# Altium PCB 0.PCB1.PcbDoc (part 7 of 8)
Units mil, origin at the board's own origin, x right, y up, seen from the top; angles counter-clockwise.
Board outline 3897.64 x 3897.64 mil, 6 copper layers (Top Layer, Layer 1, Layer 3, Layer 4, Layer 2, Bottom Layer), stack 60.567 mil thick; 715 components, 563 nets, 2530 pads, 1442 vias.
Unrouted connection lines stored in the file: 6.
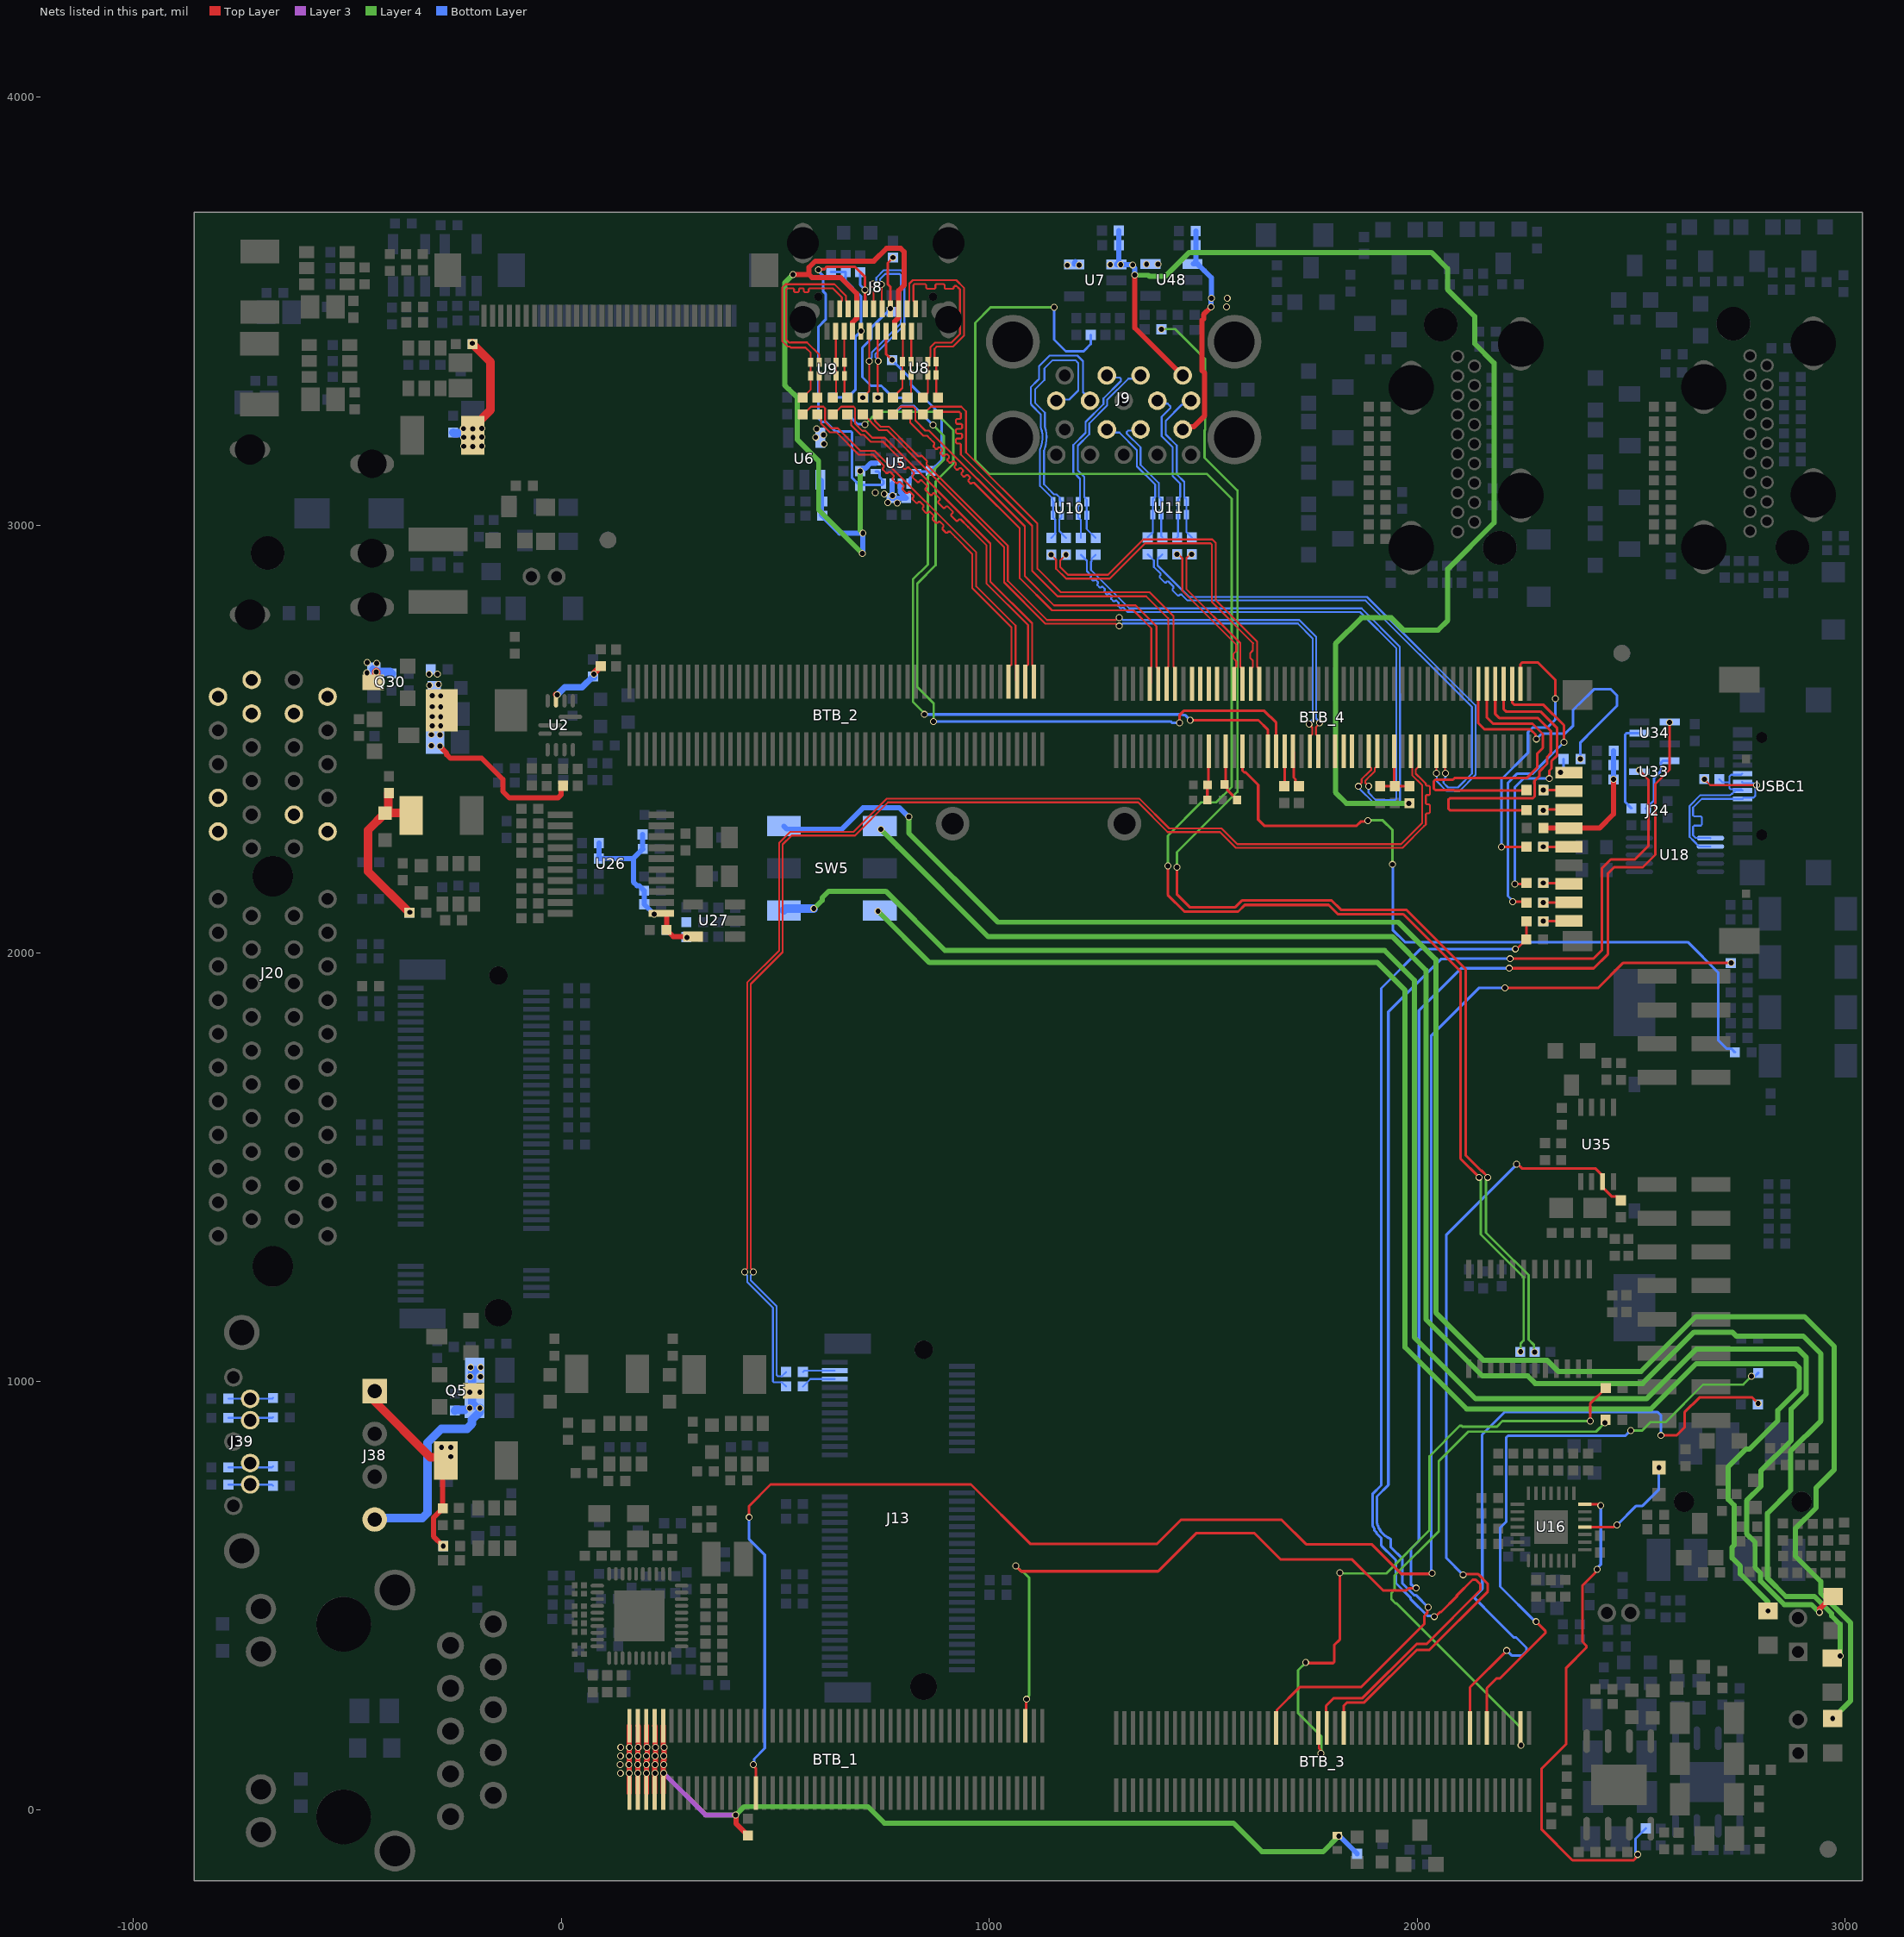
[diagram p11: the nets of this part, all layers, seen from the top]

## Via types
v1: diameter 16.14, hole 11.81, Top Layer to Bottom Layer, tented both sides, 1434 vias
v2: diameter 16.14, hole 11.81, Top Layer to Bottom Layer, 8 vias

## Nets (pads, with @x,y where several pads share a name; then routed paths per layer and width w, separated by ;. In a path a pad name is that pad's centre, name@x,y a point inside that pad or via, vN(x,y) a via of type N, cw(c..) or ccw(c..) an arc to the next point about the centre after c; other vN are vias at no path point) (continued)
RESETn: BTB_1.85 R5.2 | length 4461.4
  Top Layer w6.16: v1(439.3,682.4) 439.3,709.1 489.4,759.2 957.5,759.2 1096.6,620.1 1391.4,620.1 1447.8,676.5 1683.5,676.5 1740.4,619.6 1893.5,619.6 1962.7,550.4 2032.8,550.4 v1(2034.5,552.1) ; v1(448.9,105.1) 448.9,102.4 454.76,96.54 454.76,55.76 BTB_1.85@454.2,55.2 ; v1(2205,1918.9) 2422.6,1918.9 2481.6,1977.9 v1(2733.4,1977.9)
  Bottom Layer w6.16: v1(439.3,682.4) 439.3,631.1 475.7,594.7 475.7,143 450.81,118.11 450.81,107.01 v1(448.9,105.1) ; v1(2034.5,552.1) 2032.84,553.76 2032.84,594.84 2033.2,595.2 2033.2,1808.2 2143.9,1918.9 v1(2205,1918.9) ; R5.2@2732.42,1977 2732.5,1977 v1(2733.4,1977.9)
ROUT1: C287.1 U16.11 | length 260.4
  Top Layer w6.16: U16.11@2391.71,659.92 2459.5,659.92 2463.96,664.37 v1(2466.61,664.37)
  Bottom Layer w6.16: v1(2466.61,664.37) 2466.66,664.37 2511.63,709.35 2526.53,709.35 2564.81,747.62 v1(2564.81,798.62)
ROUT2: C308.1 U16.14 | length 1194.7
  Top Layer w6.16: U16.14@2391.71,713.07 2423.39,713.07 2426.21,710.25 v1(2428.91,710.25) ; v1(2420.11,560.94) 2420.11,558.24 2415.64,553.76 2415.64,553.09 2386.05,523.5 2386.05,391.71 2394.96,382.8 2394.96,377.7 2348.21,330.95 2348.21,153.35 2290.87,96.01 2290.87,-46.78 2362.62,-118.53 2505.82,-118.53 2509.97,-114.38 2509.97,-112.72 2514.96,-107.73 v1(2514.96,-105.03)
  Bottom Layer w6.16: v1(2420.11,560.94) 2420.11,563.64 2428.91,572.43 v1(2428.91,710.25) ; v1(2514.96,-105.03) 2514.96,-104.28 2509.95,-99.27 2509.95,-68.45 C308.1@2534.11,-44.29
RTC_INT: BTB_3.28 R3.2 U35.3 | length 1919.4
  Top Layer w6.16: BTB_3.28@1827.98,190.65 1827.98,241.78 1836.3,250.1 1876.5,250.1 1999,372.6 2028.3,372.6 2165.1,509.4 2165.1,526.8 2141.7,550.2 2108.84,550.2 v1(2106.99,548.35) ; v1(2232.47,1507.23) 2235.17,1507.23 2244.6,1497.8 2416.16,1497.8 2433.09,1480.87 U35.3@2433.09,1467.09 2433.09,1453.31 2454.9,1431.5 2466.88,1431.5 2472.4,1425.98 R3.2@2472.4,1424.3
  Bottom Layer w6.16: v1(2106.99,548.35) 2106.99,548.54 2068.3,587.22 2068.3,1343.06 v1(2232.47,1507.23)
SARADC_IN0_BOOT: BTB_4.85 R1.2 | length 1756.2
  Top Layer w6.16: BTB_4.85@1591.76,2472.17 1591.76,2426.84 1596.04,2422.56 1599.44,2422.56 1628.5,2393.5 1628.5,2312.3 1643.4,2297.4 1857.7,2297.4 1868,2307.7 1882.78,2307.7 v1(1884.69,2309.61)
  Layer 4 w6.16: v1(1884.69,2309.61) 1885.77,2310.7 1919.59,2310.7 1942,2288.29 v1(1942,2207.8)
  Bottom Layer w6.16: v1(1942,2207.8) 1942.8,2207 1942.8,2054.6 1971.2,2026.2 2632.2,2026.2 2703.28,1955.12 2703.28,1796.62 2722.28,1777.62 2733.5,1777.62 R1.2@2742.22,1768.9
SARADC_IN2: BTB_4.89 R20.1 R22.2 | length 113.4
  Top Layer w6.16: R22.2@1509.73,2358.5 1509.73,2393.83 R20.1@1509.9,2394 ; R22.2@1510.05,2357.7 R22.2@1513.02,2360.68 ; R20.1@1510.47,2393.5 1512.1,2395.13 BTB_4.89@1512.1,2466.4
SARADC_IN3: BTB_4.87 R21.1 R23.2 | length 130.7
  Top Layer w6.16: R21.1@1547.3,2396.9 1548.13,2396.9 1552.39,2401.16 BTB_4.87@1552.39,2472.17 ; R21.1@1552.6,2392.3 1556.73,2388.17 1556.73,2380.9 R23.2@1579.33,2358.3 R23.2@1573.85,2352.82
SATA30_0_RXN_R: C297.2 D86.2 J39.5 | length 105
  Bottom Layer w4.29: D86.2@-777.54,914.8 -674.52,914.8 C297.2@-673.12,916.2
SATA30_0_RXP_R: C298.2 D85.2 J39.6 | length 105.1
  Bottom Layer w4.29: D85.2@-777.54,959.8 -674.72,959.8 C298.2@-673.12,961.4
SATA30_0_TXN_R: C296.2 D87.2 J39.3 | length 105.5
  Bottom Layer w4.29: D87.2@-777.54,799.1 -675.62,799.1 C296.2@-673.12,801.6
SATA30_0_TXP_R: C295.2 D88.2 J39.2 | length 105.4
  Bottom Layer w4.29: D88.2@-777.54,758.9 -675.52,758.9 C295.2@-673.12,756.5
SATA_5V0: C290.2 C291.1 C292.1 J38.1 L26.2 R316.2 | length 457.4
  Top Layer w12: v1(-275.5,615.47) -298.42,638.39 -298.42,681.57 C292.1@-276.62,703.37 -276.62,808.34 L26.2@-269.69,815.27 -260.59,824.37 v1(-258.12,824.37)
  Top Layer w20: J38.1@-435.32,952.6 -305.82,823.1 -287.25,823.1 -276.62,812.47 L26.2@-276.62,808.34
  other v1: -279.52,846.17 -257.72,845.77
SATA_12V: C280.1 C281.1 C282.1 J38.4 Q5.3 | length 560.6
  Bottom Layer w20: J38.4@-425.25,680.9 -324.04,680.9 -312.32,692.62 -312.32,856.8 -279.92,889.2 -219.92,889.2 -208.21,900.92 -208.21,910.5 -189.89,928.81 v1(-189.89,937.91) ; C282.1@-248.22,931.82 -246.42,933.62 C280.1@-225.2,933.62 ; C280.1@-202.36,943.2 -207.98,948.82 -207.98,974.6 -207.98,1020.08 C281.1@-201.86,1026.2
  other v1: -213.42,937.91 -213.42,974.6 -189.89,974.6 -212.2,1011.1 -188.6,1011.1 -211.42,1032.71 -187.89,1032.71
SDMMC_CLK: BTB_4.49 R280.1 | length 666.7
  Top Layer w6.16: v1(2196.8,2248.7) 2255.18,2248.7 R280.1@2255.4,2248.92 ; BTB_4.49@2241.37,2629.65 2241.37,2675.59 2244.98,2679.2 2282.5,2679.2 2322.8,2638.9 v1(2322.8,2595)
  Bottom Layer w6.16: v1(2196.8,2248.7) 2196.8,2406.6 2258.8,2468.6 2258.8,2516.6 2269.7,2527.5 2304,2527.5 2322.8,2546.3 v1(2322.8,2595)
SDMMC_CLK_R: D19.2 J24.5 R280.2 | length 60.1
  Top Layer w6.16: v1(2294.76,2248.92) 2354.39,2248.92 J24.5@2354.73,2249.27
SDMMC_CMD: BTB_4.46 R279.1 | length 795.5
  Top Layer w6.16: BTB_4.46@2182.32,2629.65 2182.32,2559.19 2191.6,2549.9 2281.6,2549.9 2312.2,2519.3 2312.2,2467.5 2303.61,2458.91 2303.61,2442.94 2285.85,2425.18 2285.85,2414.55 2273.9,2402.6 2273.9,2396.51 2274.36,2396.05 2274.36,2366.2 2273.97,2366.2 2270.21,2362.44 2076.41,2362.44 2072.8,2358.83 2072.8,2338.03 2076.41,2334.42 R279.1@2255.4,2334.42
SDMMC_CMD_R: D20.2 J24.3 R279.2 | length 60.6
  Top Layer w6.16: v1(2294.76,2334.42) 2296.23,2335.89 J24.3@2354.73,2335.89
SDMMC_D0: BTB_4.47 R281.1 | length 670.9
  Top Layer w6.16: BTB_4.47@2202,2629.65 2202,2570.35 2207.45,2564.9 2287.9,2564.9 2327.1,2525.7 2327.1,2462.5 2313.77,2449.17 2313.77,2431.81 2308.6,2426.64 v1(2308.6,2408.2) ; v1(2228.2,2162.1) 2253.18,2162.1 R281.1@2255.4,2164.32
  Bottom Layer w6.16: v1(2228.2,2162.1) 2228.2,2388.13 2248.27,2408.2 v1(2308.6,2408.2)
SDMMC_D0_R: D18.2 J24.7 R281.2 | length 60.7
  Top Layer w6.16: v1(2294.76,2164.32) 2353.08,2164.32 J24.7@2354.73,2162.66
SDMMC_D1: BTB_4.48 R282.1 | length 712
  Top Layer w6.16: BTB_4.48@2221.68,2629.65 2222.24,2629.1 2222.24,2585.17 2226.21,2581.2 2294.3,2581.2 2342.8,2532.7 v1(2342.8,2493) ; v1(2223.4,2120.7) 2253.02,2120.7 R282.1@2255.4,2118.32
  Bottom Layer w6.16: v1(2223.4,2120.7) 2223.4,2122.28 2211.95,2133.73 2211.95,2398.15 2233.84,2420.04 2269.84,2420.04 v1(2342.8,2493)
SDMMC_D1_R: D17.2 J24.8 R282.2 | length 60.4
  Top Layer w6.16: v1(2294.76,2118.32) 2353.7,2118.32 J24.8@2354.73,2119.35
SDMMC_D2: BTB_4.44 R275.1 | length 696.2
  Top Layer w6.16: BTB_4.44@2142.94,2629.65 2142.94,2537.66 2157.58,2523.02 2264.51,2523.02 2276.39,2511.14 2276.39,2502.51 v1(2278.3,2500.6)
  Bottom Layer w6.16: v1(2278.3,2500.6) 2290.9,2513.2 2345.7,2513.2 2364.4,2531.9 2364.4,2568.7 2377.3,2581.6 2377.9,2581.6 2413.7,2617.4 2451.7,2617.4 2466.6,2602.5 2466.6,2578 2413.5,2524.9 2413.5,2524.8 2381.38,2492.68 v1(2381.38,2453.8)
SDMMC_D2_R: D22.2 J24.1 R275.2 | length 34.2
  Bottom Layer w6.16: v1(2335.05,2422.5) 2342.02,2429.47 R275.2@2342.02,2453.8
SDMMC_D3: BTB_4.45 R278.1 | length 794.5
  Top Layer w6.16: 2086.4,2381.3 2086.31,2381.3 ; BTB_4.45@2162.63,2629.65 2162.63,2550.87 2177.2,2536.3 2269.4,2536.3 2293.45,2512.25 2293.45,2479.7 2280.5,2466.75 2280.5,2434.2 2255.48,2409.18 2087.01,2409.18 2083.4,2405.57 2042.51,2405.57 2038.9,2401.96 2038.9,2384.91 2042.51,2381.3 2086.31,2381.3 ; R278.1@2250.5,2380.6 2087.01,2380.6 2086.31,2381.3
SDMMC_D3_R: D21.2 J24.2 R278.2 | length 60.8
  Top Layer w6.16: v1(2294.84,2381.32) 2352.6,2381.32 J24.2@2354.73,2379.19
SDMMC_DET: BTB_3.26 R283.1 R284.2 | length 2617.8
  Top Layer w6.16: BTB_3.26@1787.2,223.69 1787.2,242.09 1805.37,260.26 1872.29,260.26 1998.53,386.5 2021.7,386.5 2147.74,512.54 2147.74,525.97 2136.73,536.99 2129.33,536.99 2092.72,500.37 2092.72,498.08 2056.1,461.46 2053.6,461.46 2042.87,450.73 v1(2040.17,450.73) ; v1(2229.5,2010.3) 2231,2011.8 2234,2011.8 R284.2@2254.9,2032.7 ; R283.1@2255.4,2075.02 2255.4,2041.62 R284.2@2255.5,2041.52
  Bottom Layer w6.16: v1(2040.17,450.73) 2038.26,452.64 2023.63,452.64 1984.02,492.26 1984.02,495.04 1950.18,528.88 1950.18,582.52 1944.4,588.3 1917.6,615.1 1915.8,616.9 1915.8,633.97 1904.81,644.96 1904.81,646.87 1904.14,647.88 1903.02,649 1901.39,650.63 1900.29,651.73 1900.29,655.44 1899.8,656.63 1897.73,658.7 1897.73,660.22 1895.54,662.41 1895.54,736.94 1915.8,757.2 1915.8,1918.1 2008,2010.3 v1(2229.5,2010.3)
SDMMC_DET_R: D16.2 J24.9 R283.2 | length 60.4
  Top Layer w6.16: v1(2294.76,2075.02) 2353.71,2075.02 J24.9@2354.73,2076.04
speaker1+: R210.2 SW5.1 | length 4587.6
  Layer 4 w12: v1(812.3,2319.2) 812.3,2280.7 1020.2,2072.8 1955.9,2072.8 2043.4,1985.3 2043.4,1160.7 2154.96,1049.14 2303.76,1049.14 2329.4,1023.5 2523.1,1023.5 2651,1151.4 2904.6,1151.4 2974.4,1081.6 2974.4,793.9 2932.13,751.63 2932.13,704.99 2883.4,656.27 2883.4,592.1 2942.7,532.8 2942.7,505.73 3012,436.43 3012,253.6 v1(2970.7,212.3)
  Bottom Layer w12: SW5.1@520.09,2297.02 526.81,2290.3 655.8,2290.3 705.2,2339.7 790.68,2339.7 811.18,2319.2 v1(812.3,2319.2)
speaker1-: R211.2 SW5.4 | length 4148.5
  Layer 4 w12: v1(747,2289.5) 786.6,2249.9 786.6,2249.7 997.6,2038.7 1942.4,2038.7 2020.8,1960.3 2020.8,1144.6 2152.4,1013 2258,1013 2275.8,995.2 2526.7,995.2 2646.7,1115.2 2736.21,1115.2 2745.41,1106 2901.6,1106 2943.3,1064.3 2943.3,908.2 2872.2,837.1 2872.2,745.8 2818.4,692 2818.4,540.4 2861.3,497.5 2928.3,497.5 2968,457.8 2968,452.2 2988.4,431.8 v1(2988.4,358.3)
speaker2+: R212.2 SW5.3 | length 4260.6
  Top Layer w12: v1(2939.52,460.72) 2940.31,461.51 2940.31,468.94 2969.1,497.73 R212.2@2971.6,497.73
  Layer 4 w12: v1(590.37,2104.4) 610.01,2124.04 610.01,2130.11 625.1,2145.2 758.3,2145.2 896.5,2007 1923.7,2007 1993.3,1937.4 1993.3,1102.7 2136.6,959.4 2535.7,959.4 2652.2,1075.9 2889.1,1075.9 2909,1056 2909,970.7 2873.5,935.2 2873.5,861.88 2803.4,791.78 2803.4,755.3 2769.4,721.3 2769.4,644.4 2789.4,624.4 2789.4,565 2802.4,552 2802.4,533.77 2857.35,478.82 2920.75,478.82 2938.86,460.72 v1(2939.52,460.72)
  Bottom Layer w20: SW5.3@520.09,2100.18 524.31,2104.4 v1(590.37,2104.4)
speaker2-: R213.2 SW5.6 | length 3853.7
  Layer 4 w12: v1(740.4,2098.5) 860.5,1978.4 1907.3,1978.4 1971.72,1913.98 1971.72,1079.58 2115.4,935.9 2546.14,935.9 2651.61,1041.37 2882.33,1041.37 2893,1030.7 2893,982.98 2842.2,932.18 2842.2,908.04 2775.79,841.63 2767.53,841.63 2726.91,801.01 2726.91,724.37 2740.38,710.9 2740.38,617.38 2735.8,612.8 2735.8,587.42 2754.95,568.27 2754.95,549.88 2819.5,485.33 v1(2819.5,463.8)
TYPEC0_SBU1: BTB_4.81 C84.2 | length 1919.8
  Top Layer w6.16: v1(1444.4,2538.49) 1444.4,2556.3 1454.5,2566.4 1642.8,2566.4 1670.5,2538.7 BTB_4.81@1670.5,2472.17
  Layer 4 w5.61: v1(709.4,3235.05) 739.35,3265 873,3265 915.9,3222.1 915.9,3143.5 875,3102.6 875,2906.7 832,2863.7 832,2621.9 870.3,2583.6 870.3,2542.4 v1(869.6,2541.7)
  Bottom Layer w6.16: C84.2@669.7,3258.92 692.22,3236.4 708.05,3236.4 v1(709.4,3235.05) ; v1(869.6,2541.7) 1424.01,2541.7 1427.09,2538.62 1444.27,2538.62 v1(1444.4,2538.49)
TYPEC0_SBU2: BTB_4.82 C85.2 | length 1714.3
  Top Layer w6.16: v1(1469.56,2544.6) 1629,2544.6 1650.82,2522.78 BTB_4.82@1650.82,2472.17
  Layer 4 w5.61: v1(848.9,2558.15) 848.9,2560.7 821.8,2587.8 821.8,2744.6 821.8,2873.4 856.5,2908.1 856.5,3115 894.1,3152.6 894.1,3208.8 v1(868.5,3234.4)
  Bottom Layer w6.16: C85.2@775.6,3258.74 795.06,3278.2 824.7,3278.2 v1(868.5,3234.4) ; v1(848.9,2558.15) 1451.85,2558.15 1453.06,2556.94 1457.21,2556.94 v1(1469.56,2544.6)
TYPEC0_SSRX1N: BTB_4.7 R86.2 | length 1076.5
  Top Layer w4.42: R86.2@880.5,3258.92 886.58,3265 929.85,3265 930.35,3264.5 933.83,3261.02 933.83,3250.87 931.24,3248.28 924.55,3248.28 922.27,3246 922.27,3239.14 924.55,3236.86 934.33,3236.86 936.61,3234.58 936.61,3227.72 934.33,3225.44 924.55,3225.44 922.27,3223.16 922.27,3216.3 924.55,3214.02 934.33,3214.02 936.61,3211.74 936.61,3204.88 934.33,3202.6 924.55,3202.6 922.27,3200.32 922.27,3193.46 924.55,3191.18 931.24,3191.18 933.83,3188.59 933.83,3182.9 933.83,3165.18 1100.5,2998.51 1100.5,2893.25 1159.77,2833.98 1366.87,2833.98 1418.34,2782.51 1418.34,2669.4 1417.31,2668.37 1417.31,2632.36 BTB_4.7@1414.6,2629.65
TYPEC0_SSRX1P: BTB_4.8 R85.2 | length 1072.8
  Top Layer w4.42: R85.2@845.37,3258.92 863.65,3277.2 934.9,3277.2 946.03,3266.07 946.03,3170.24 1112.7,3003.57 1112.7,2898.3 1167.6,2843.4 1374.7,2843.4 1430.54,2787.56 1430.54,2669.4 1431.57,2668.37 1431.57,2632.36 BTB_4.8@1434.28,2629.65
TYPEC0_SSRX2N: BTB_2.48 R91.2 | length 894.3
  Top Layer w4.42: R91.2@668.5,3258.92 677.4,3250.02 677.4,3233.53 699.58,3211.35 706.7,3211.35 723.07,3194.98 752.02,3194.98 776.75,3170.25 793.46,3153.54 793.46,3149.88 789.98,3146.39 789.98,3143.37 802.09,3131.25 805.12,3131.25 808.92,3135.05 811.95,3135.05 824.07,3122.93 824.07,3119.9 820.27,3116.1 820.27,3113.07 832.38,3100.96 835.41,3100.96 839.21,3104.75 842.24,3104.75 854.36,3092.64 854.36,3089.61 850.56,3085.81 850.56,3082.78 862.68,3070.66 865.71,3070.66 869.5,3074.46 872.53,3074.46 884.65,3062.35 884.65,3059.32 880.85,3055.52 880.85,3052.49 892.97,3040.37 896,3040.37 899.8,3044.17 902.83,3044.17 914.94,3032.05 914.94,3029.02 911.14,3025.23 911.14,3022.2 923.26,3010.08 926.29,3010.08 929.77,3013.56 933.43,3013.56 950.71,2996.29 993.48,2953.52 993.48,2864.32 1090.83,2766.97 1090.83,2674.4 1088.24,2671.81 1087.4,2671.81 1084.69,2669.1 BTB_2.48@1084.69,2634.65
TYPEC0_SSRX2P: BTB_2.49 R89.2 | length 893.8
  Top Layer w4.42: R89.2@634.57,3258.92 644.16,3268.51 645.71,3268.51 654.13,3276.93 682.87,3276.93 686.82,3272.98 686.82,3237.43 703.48,3220.77 710.6,3220.77 726.97,3204.4 755.92,3204.4 1002.9,2957.42 1002.9,2868.22 1100.25,2770.87 1100.25,2673.22 1104.37,2669.1 BTB_2.49@1104.37,2634.65
TYPEC0_SSTX1N: BTB_4.6 C80.2 | length 1056.1
  Top Layer w4.42: C80.2@775.1,3258.92 793.11,3276.93 822.77,3276.93 827.36,3272.34 827.36,3244.55 850.74,3221.16 859.51,3221.16 1083.22,2997.45 1083.22,2881.2 1151.5,2812.92 1341.96,2812.92 1390.76,2764.12 1390.76,2668.25 1394.91,2664.1 BTB_4.6@1394.91,2629.65
TYPEC0_SSTX1P: BTB_4.5 C79.2 | length 1062.1
  Top Layer w4.42: C79.2@808.4,3258.92 815.55,3251.77 815.55,3239.66 845.85,3209.35 854.62,3209.35 862.49,3201.49 872.12,3191.85 872.12,3188.19 870.45,3186.52 870.45,3183.29 875.3,3178.44 878.53,3178.44 882.1,3182.01 885.33,3182.01 890.18,3177.17 890.18,3173.94 886.6,3170.37 886.6,3167.14 891.45,3162.29 894.68,3162.29 898.25,3165.86 901.48,3165.86 906.33,3161.02 906.33,3157.79 902.75,3154.22 902.75,3150.99 907.6,3146.14 910.83,3146.14 914.4,3149.71 917.63,3149.71 922.48,3144.87 922.48,3141.64 918.91,3138.07 918.91,3134.84 923.75,3129.99 926.98,3129.99 930.55,3133.56 933.78,3133.56 938.63,3128.72 938.63,3125.49 935.06,3121.92 935.06,3118.69 939.9,3113.84 943.13,3113.84 946.7,3117.41 949.93,3117.41 954.78,3112.57 954.78,3109.34 951.21,3105.76 951.21,3102.53 956.05,3097.69 959.28,3097.69 960.95,3099.36 964.61,3099.36 968.61,3095.36 1071.41,2992.56 1071.41,2876.31 1146.61,2801.11 1337.07,2801.11 1378.96,2759.23 1378.96,2669.4 1377.94,2668.39 1377.94,2632.36 BTB_4.5@1375.23,2629.65
TYPEC0_SSTX2N: BTB_2.47 C83.2 | length 914.2
  Top Layer w4.42: C83.2@564.3,3258.92 573.89,3268.51 575.51,3268.51 584.03,3277.03 612.77,3277.03 616.56,3273.24 616.56,3241.38 631.15,3226.79 646.5,3226.79 699.28,3174.01 732.59,3174.01 969.82,2936.78 969.82,2857.3 1061.52,2765.6 1061.52,2674.4 1062.29,2673.64 1062.29,2637.36 BTB_2.47@1065,2634.65
TYPEC0_SSTX2P: BTB_2.46 C82.2 | length 920.7
  Top Layer w4.42: C82.2@598.4,3259.02 607.14,3250.28 607.14,3237.48 627.24,3217.37 642.6,3217.37 695.38,3164.59 728.69,3164.59 740.64,3152.64 753.81,3139.47 753.81,3135.81 751.49,3133.48 751.49,3130 759.62,3121.87 763.1,3121.87 765.51,3124.28 769,3124.28 777.13,3116.16 777.13,3112.67 774.71,3110.26 774.71,3106.78 782.84,3098.65 786.32,3098.65 788.74,3101.06 792.22,3101.06 800.35,3092.94 800.35,3089.45 797.93,3087.04 797.93,3083.55 806.06,3075.43 809.54,3075.43 811.96,3077.84 815.44,3077.84 823.57,3069.71 823.57,3066.23 821.15,3063.82 821.15,3060.33 829.28,3052.21 832.76,3052.21 835.18,3054.62 838.66,3054.62 846.79,3046.49 846.79,3043.01 844.37,3040.59 844.37,3037.11 852.5,3028.98 855.99,3028.98 858.4,3031.4 861.88,3031.4 870.01,3023.27 870.01,3019.79 867.6,3017.37 867.6,3013.89 875.72,3005.76 879.21,3005.76 881.62,3008.18 885.1,3008.18 893.23,3000.05 893.23,2996.57 890.82,2994.15 890.82,2990.67 898.94,2982.54 902.43,2982.54 904.75,2984.87 908.42,2984.87 920.56,2972.73 960.4,2932.88 960.4,2853.4 1052.1,2761.7 1052.1,2674.4 1049.52,2671.81 1048.03,2671.81 1045.32,2669.1 BTB_2.46@1045.32,2634.65
TYPEC0_USB20_OTG_DM: BTB_4.77 R82.2 | length 1593.8
  Top Layer w4.4: R82.2@704.83,3258.92 714.43,3249.32 716.21,3249.32 725.01,3240.52 725.01,3239.62 742.61,3222.02 761.84,3222.02 800.57,3183.3 800.57,3183.25 813.85,3169.97 813.9,3169.97 1035.05,2948.82 1035.05,2866.57 1131.42,2770.2 1295.45,2770.2 1301,2764.65 v1(1303.9,2764.65) ; v1(1747.4,2535.8) 1747.4,2534.84 1754.89,2527.35 1754.89,2511.92 1752.31,2509.34 1751.97,2509.34 1749.24,2506.62 BTB_4.77@1749.24,2472.17
  Bottom Layer w4.4: v1(1303.9,2764.65) 1306.61,2764.65 1312.35,2770.39 1721.21,2770.39 1755.65,2735.95 1755.65,2547.23 1747.4,2538.98 v1(1747.4,2535.8)
TYPEC0_USB20_OTG_DP: BTB_4.76 R81.2 | length 1594.3
  Top Layer w4.4: R81.2@739.97,3258.92 733.41,3252.37 733.41,3243.1 746.09,3230.42 765.32,3230.42 808.97,3186.78 808.97,3186.73 817.33,3178.37 817.38,3178.37 820.32,3175.42 834.86,3160.89 838.5,3160.89 839.68,3162.07 842.71,3162.07 854.82,3149.96 854.82,3146.94 853.64,3145.76 853.64,3142.11 870.32,3125.42 1043.45,2952.3 1043.45,2870.05 1134.9,2778.6 1295.32,2778.6 1301.06,2784.34 v1(1303.77,2784.34) ; BTB_4.76@1768.93,2472.17 1768.93,2506.62 1766.21,2509.34 1765.86,2509.34 1763.29,2511.92 1763.29,2528.33 1771.54,2536.59 v1(1771.54,2538)
  Bottom Layer w4.4: v1(1303.77,2784.34) 1306.67,2784.34 1312.22,2778.79 1724.69,2778.79 1764.05,2739.43 1764.05,2548.67 1771.54,2541.18 v1(1771.54,2538)
TYPEC0_USB20_OTG_ID: BTB_4.79 R78.2 | length 87.5
  Top Layer w6.16: BTB_4.79@1709.87,2472.17 1711.72,2470.33 1711.72,2410.75 1715.71,2406.76 1715.71,2398.34 R78.2@1723.67,2390.38
TYPEC0_USB20_VBUSDET: BTB_4.80 R77.2 | length 81.8
  Top Layer w6.16: R77.2@1689.57,2390.66 1690.19,2391.28 BTB_4.80@1690.19,2472.17
TYPEC1_SBU1: BTB_4.72
TYPEC1_SBU2: BTB_4.73
TYPEC1_SSRX1N: BTB_4.18 R83.2 | length 814.7
  Top Layer w4.42: v1(1179.35,2931.38) 1165.8,2917.83 1165.8,2902.5 1183.78,2884.52 1277.8,2884.52 1360.38,2967.1 1521.41,2967.1 1529.52,2958.99 1529.52,2824.68 1626,2728.2 1626,2669.23 1631.13,2664.1 BTB_4.18@1631.13,2629.65
TYPEC1_SSRX1P: BTB_4.17 R84.2 | length 816.3
  Top Layer w4.42: v1(1144.85,2931.38) 1156.38,2919.85 1156.38,2898.6 1179.88,2875.1 1281.7,2875.1 1364.28,2957.68 1517.51,2957.68 1520.1,2955.09 1520.1,2820.78 1616.58,2724.3 ; BTB_4.17@1611.45,2629.65 BTB_4.17@1611.45,2664.1 ; BTB_4.17@1613.4,2666 1613.4,2666.05 1616.01,2668.66 1616.01,2669.91 ; 1615.9,2669.8 1616.01,2669.91 ; 1616.4,2724.2 1616.01,2723.81 1616.01,2707.49 1609.7,2701.18 1609.7,2690.12 1616.01,2683.81 1616.01,2669.91
TYPEC1_SSRX2N: BTB_4.13
TYPEC1_SSRX2P: BTB_4.12
TYPEC1_SSTX1N: BTB_4.15 C75.2 | length 369.7
  Top Layer w4.42: v1(1438.7,2932.4) 1441.87,2932.4 1451.18,2923.09 1451.18,2847.02 1577.21,2720.99 1577.21,2706.19 1570.9,2699.88 1570.9,2688.82 1577.21,2682.51 1577.21,2669.24 1572.08,2664.1 BTB_4.15@1572.08,2629.65
  Bottom Layer w4.42: v1(1438.7,2932.4) 1438.92,2932.4 C75.2@1439.05,2932.27
TYPEC1_SSTX1P: BTB_4.16 C76.2 | length 364.1
  Top Layer w4.42: v1(1473.08,2932.4) 1469.9,2932.4 1460.6,2923.09 1460.6,2850.92 1586.63,2724.89 1586.63,2669.24 1591.76,2664.1 BTB_4.16@1591.76,2629.65
TYPEC1_SSTX2N: BTB_4.10
TYPEC1_SSTX2P: BTB_4.11
TYPEC1_USB20_OTG_DM: BTB_4.70 R79.2 | length 1412
  Top Layer w4.4: v1(1862.7,2390) 1862.7,2390.89 1870.26,2398.45 1870.26,2406.79 1887.04,2423.56 1887.42,2423.56 1892.63,2428.78 1892.63,2432.43 1890.05,2435 1889.76,2435 1887.04,2437.72 BTB_4.70@1887.04,2472.17
  Bottom Layer w4.4: R79.2@1248.7,2931.25 1239.1,2921.65 1239.1,2915.7 1238.02,2914.63 1238.02,2895.18 1327.5,2805.7 1869.98,2805.7 1959.3,2716.38 1959.3,2606.21 1959.87,2605.63 1959.87,2356.85 1952.03,2349.01 1911.25,2349.01 1910.68,2349.59 1900.13,2349.59 1862.7,2387.02 v1(1862.7,2390)
TYPEC1_USB20_OTG_DP: BTB_4.69 R80.2 | length 1418.2
  Top Layer w4.4: v1(1886.3,2390.2) 1886.3,2391.01 1878.66,2398.65 1878.66,2403.31 1890.52,2415.16 1890.89,2415.16 1901.03,2425.3 1901.03,2432.38 1903.66,2435 1904,2435 1906.72,2437.72 BTB_4.69@1906.72,2472.17
  Bottom Layer w4.4: R80.2@1214.2,2931.25 1228.3,2917.15 1228.3,2898.4 1228.3,2893.02 1237.8,2883.52 1237.8,2879.87 1236.55,2878.61 1236.55,2876.19 1242.19,2870.55 1244.61,2870.55 1246.48,2872.42 1248.9,2872.42 1254.54,2866.78 1254.54,2864.36 1252.67,2862.49 1252.67,2860.07 1258.31,2854.43 1260.73,2854.43 1262.6,2856.3 1265.02,2856.3 1270.66,2850.66 1270.66,2848.24 1268.79,2846.37 1268.79,2843.95 1274.43,2838.31 1276.85,2838.31 1278.72,2840.18 1281.14,2840.18 1286.78,2834.54 1286.78,2832.12 1284.91,2830.25 1284.91,2827.83 1290.55,2822.18 1292.97,2822.18 1294.84,2824.06 1297.26,2824.06 1302.91,2818.41 1302.91,2816 1301.03,2814.12 1301.03,2811.71 1306.68,2806.06 1309.09,2806.06 1310.35,2807.32 1314,2807.32 1317.44,2803.88 1324.02,2797.3 1866.5,2797.3 1950.9,2712.9 1950.9,2360.56 1948.32,2357.99 1903.61,2357.99 1886.3,2375.3 v1(1886.3,2390.2)
TYPEC1_USB20_OTG_ID: BTB_4.74
TYPEC1_USB20_VBUSDET: BTB_4.67 C253.1 R149.1 R150.2 | length 150.2
  Top Layer w6.16: C253.1@1913.6,2390.28 R150.2@1981.9,2390.3 ; R149.1@1946.09,2390.67 BTB_4.67@1946.09,2472.17 ; R149.1@1947.7,2390.38 R149.1@1947.99,2390.67
TYPEC_CC1: C78.1 D10.2 J8.A5 U5.10 U5.11 | length 462.9
  Top Layer w6.16: J8.A5@759.21,3453.02 759.21,3399.89 v1(773.1,3386)
  Bottom Layer w6.16: v1(773.1,3386) 817.18,3341.92 817.18,3328.07 888.9,3256.35 888.9,3152.74 C78.1@863.06,3126.9 861.47,3125.32 U5.10@830.3,3125.32 824.39,3125.32 821.57,3122.49 821.57,3116.58 815.01,3110.03 815.01,3100.19 U5.11@812.19,3097.36
TYPEC_CC2: C77.1 D11.2 J8.B5 U5.1 U5.14 | length 924.4
  Top Layer w6.16: v1(600.8,3596.57) 602.44,3598.21 614.93,3598.21 620.84,3604.12 685.7,3604.12 710,3579.82 v1(710,3549.8) 710.2,3549.6 710.2,3505.97 J8.B5@710.39,3505.77
  Bottom Layer w6.16: v1(600.8,3596.57) 600.8,3593.93 611.72,3583.01 611.72,3546.88 617.86,3540.74 617.86,3480.16 601.14,3463.44 601.14,3249.46 609,3241.6 618.28,3241.6 640.34,3219.54 676.27,3219.54 679.88,3215.93 679.88,3110.38 C77.1@698.76,3091.5 701.59,3094.33 750.31,3094.33 753.13,3097.15 753.13,3103.27 743.75,3112.65 743.75,3122.49 740.93,3125.32 U5.1@735.02,3125.32 ; D11.2@698.7,3591.12 698.7,3561.1 v1(710,3549.8)
TYPEC_DM: D9.2 J8.A7 J8.B7 R82.1 | length 518.9
  Top Layer w4.4: v1(704.83,3298.28) 719.9,3313.35 v1(719.9,3383.15) 719.9,3452.96 J8.A7@719.84,3453.02 ; v1(747.91,3562.4) 748.83,3561.48 748.83,3506.7 J8.B7@749.76,3505.77
  Bottom Layer w4.4: v1(719.9,3383.15) 719.9,3385.72 725.78,3391.6 725.78,3403.76 793.5,3471.48 793.5,3584.62 790.92,3587.19 757.17,3587.19 744.84,3574.87 744.84,3570.95 745.66,3570.13 745.66,3564.65 v1(747.91,3562.4)
TYPEC_DP: D8.2 J8.A6 J8.B6 R81.1 | length 542
  Top Layer w4.4: v1(728.25,3563.37) 729.89,3561.73 729.89,3505.96 J8.B6@730.08,3505.77 ; v1@739.52,3384.53 J8.A6@739.52,3453.02 ; v1(739.97,3298.28) 739.97,3315.6 739.52,3316.04 739.52,3382.59 v1(740.5,3383.57)
  Bottom Layer w4.4: v1(728.25,3563.37) 728.25,3563.55 736.44,3571.75 736.44,3578.35 753.69,3595.59 794.4,3595.59 801.9,3588.09 801.9,3468 734.18,3400.28 734.18,3392.02 740.5,3385.7 v1(740.5,3383.57)
TYPEC_SSRXN1: J8.B10 R86.1 U8.5 U8.6 | length 509.8
  Top Layer w4.42: J8.B10@808.42,3505.77 808.42,3519.55 813.52,3524.66 813.52,3564.59 821.63,3572.7 923.02,3572.7 941.1,3554.62 941.1,3442.84 915.54,3417.28 877.53,3417.28 872.33,3412.08 872.33,3393.6 872.54,3393.39 872.54,3386.09 U8.6@876.24,3382.4 U8.5@876.24,3350.9 876.24,3302.54 R86.1@880.5,3298.28
TYPEC_SSRXN2: J8.A10 R91.1 U9.5 U9.6 | length 158.3
  Top Layer w4.42: J8.A10@661.18,3453.02 661.54,3452.66 661.54,3380.86 U9.6@661.9,3380.5 U9.5@661.9,3349 661.9,3306.08 R91.1@669.7,3298.28
TYPEC_SSRXP1: J8.B11 R85.1 U8.4 U8.7 | length 510.3
  Top Layer w4.42: J8.B11@828.11,3505.77 828.11,3519.55 822.94,3524.72 822.94,3560.69 825.53,3563.28 826.72,3563.28 850.35,3563.28 852.94,3560.69 852.94,3554.32 855.08,3552.18 872.22,3552.18 874.36,3554.32 874.36,3561.14 876.5,3563.28 893.64,3563.28 895.78,3561.14 895.78,3554.32 897.92,3552.18 915.06,3552.18 917.2,3554.32 917.2,3556.36 919.79,3558.95 923.45,3558.95 929.08,3553.32 931.68,3550.72 931.68,3446.74 911.64,3426.7 873.63,3426.7 862.91,3415.98 862.91,3393.6 860.32,3391.01 860.25,3391.01 856.56,3387.32 U8.4@856.56,3350.9 856.56,3309.47 R85.1@845.37,3298.28
TYPEC_SSRXP2: J8.A11 R89.1 U9.4 U9.7 | length 158.2
  Top Layer w4.42: R89.1@634.57,3298.28 642.22,3305.93 U9.4@642.22,3349 U9.7@642.22,3380.5 641.86,3380.86 641.86,3452.65 J8.A11@641.49,3453.02
TYPEC_SSTXN1: C80.1 J8.A3 U8.1 U8.10 | length 164.6
  Top Layer w4.42: C80.1@775.1,3298.28 797.5,3320.68 U8.1@797.5,3350.9 U8.10@797.5,3382.4 798.24,3383.14 798.24,3452.28 J8.A3@798.97,3453.02
TYPEC_SSTXN2: C83.1 J8.B3 U9.1 U9.10 | length 511.7
  Top Layer w4.42: C83.1@564.3,3298.28 583.16,3317.14 U9.1@583.16,3349 U9.10@583.16,3380.5 583.16,3402.74 570.9,3415 536.4,3415 534.03,3417.37 528.73,3417.37 516.18,3429.92 516.18,3554.91 524.29,3563.02 638.47,3563.02 665.49,3535.99 665.49,3524.69 670.63,3519.55 J8.B3@670.63,3505.77
TYPEC_SSTXP1: C79.1 J8.A2 U8.2 U8.9 | length 158.2
  Top Layer w4.42: C79.1@810.23,3298.28 817.18,3305.23 U8.2@817.18,3350.9 U8.9@817.18,3382.4 817.92,3383.14 817.92,3452.28 J8.A2@818.66,3453.02
TYPEC_SSTXP2: C82.1 J8.B2 U9.2 U9.9 | length 505.6
  Top Layer w4.42: C82.1@599.43,3298.28 602.84,3301.69 U9.2@602.84,3349 U9.9@602.84,3380.5 602.84,3398.56 574.5,3426.9 536.4,3426.9 536.29,3426.79 532.63,3426.79 525.6,3433.82 525.6,3551.01 527.92,3553.33 528.19,3553.6 541.55,3553.6 544.14,3551.01 544.14,3546.66 546.42,3544.37 553.28,3544.37 555.56,3546.66 555.56,3551.32 557.84,3553.6 564.7,3553.6 566.98,3551.32 566.98,3546.66 569.26,3544.37 576.12,3544.37 578.4,3546.66 578.4,3551.01 580.99,3553.6 604.5,3553.6 634.56,3553.6 656.07,3532.09 656.07,3524.69 650.94,3519.55 J8.B2@650.94,3505.77
TYPEC_SUB1: C84.1 D12.2 J8.A8 R92.1 R97.1 | length 391.5
  Top Layer w6.16: J8.A8@700.15,3453.02 700.64,3453.5 v1(700.8,3453.5)
  Bottom Layer w6.16: D12.2@630.6,3592.1 631.08,3591.62 R97.1@664.8,3591.62 664.8,3571.4 700.8,3535.4 v1(700.8,3453.5) 687.4,3440.1 687.4,3315.98 C84.1@669.7,3298.28 R92.1@634.57,3298.28
TYPEC_SUB2: C85.1 D13.2 J8.B8 R94.1 R98.1 | length 440.3
  Top Layer w6.16: v1(769.05,3505.77) 769.05,3556.92 763.05,3562.92 763.05,3612.99 775.2,3625.14 v1(775.2,3625.32)
  Bottom Layer w6.16: v1(769.05,3505.77) 724.4,3461.12 724.4,3435.5 703.7,3414.8 703.7,3346 723.79,3325.91 748.11,3325.91 758.6,3315.42 758.6,3315.1 C85.1@775.6,3298.1 809.58,3298.1 R94.1@809.9,3297.78
UART2_D+: D24.2 U18.1 USBC1.A6 USBC1.B6 | length 486.4
  Top Layer w4.4: v1(2671.16,2406.52) 2684.77,2392.91 v1(2793,2392.91)
  Bottom Layer w4.4: U18.1@2685.16,2269.21 2684.9,2269.47 2650.71,2269.47 2647.88,2272.3 2644.61,2275.57 2644.61,2295.9 2647.18,2298.48 2662.63,2298.48 2664.77,2300.62 2664.77,2317.74 2662.63,2319.88 2647.18,2319.88 2644.61,2322.46 2644.61,2325.9 2644.61,2340.54 2664.86,2360.79 USBC1.B6@2760.21,2360.79 ; USBC1.B6@2759.4,2360.82 2762.22,2363.64 2785.98,2363.64 2787.16,2364.82 2787.16,2365.42 2790.06,2368.32 2790.06,2392.22 2784.91,2397.36 2762.22,2397.36 USBC1.A6@2759.4,2400.19
UART2_D-: D25.2 U18.2 USBC1.A7 USBC1.B7 | length 387.9
  Bottom Layer w4.4: U18.2@2685.16,2249.52 2658.78,2249.52 2646.86,2261.44 2636.2,2272.09 2636.2,2344.02 2661.78,2369.6 2731.7,2369.6 2735,2372.9 2735.89,2372.9 2743.47,2380.48 USBC1.A7@2760.21,2380.48 ; D25.2@2705.96,2406.56 2713.04,2399.48 2729.68,2399.48 ; USBC1.A7@2759.4,2380.5 2756.57,2383.33 2732.05,2383.33 2729.68,2385.7 2729.68,2399.48 ; USBC1.B7@2759.4,2419.87 2756.57,2417.05 2733.47,2417.05 2729.68,2413.26 2729.68,2399.48
UART2_RX: R291.2 U34.2 | length 214.3
  Bottom Layer w6.16: R291.2@2500.66,2338.88 2485.86,2353.68 2485.86,2511 2489.47,2514.61 U34.2@2520.43,2514.61
UART2_RX_M0_DEBUG: BTB_1.48 U34.4 | length 3903.2
  Top Layer w6.16: v1(1062.2,569) 1074.7,556.5 1394.8,556.5 1484.3,646 1619,646 1680.5,584.5 1847.3,584.5 1920.3,511.5 1974.6,511.5 1980.22,517.12 1997.34,517.12 v1(1997.53,517.32) ; BTB_1.48@1086.1,221.5 1086.01,221.59 1086.01,256.21 v1(1087.34,257.54) ; v1(2215.2,1965.1) 2412.5,1965.1 2445.8,1998.4 2445.8,2186.9 2460,2201.1 2527,2201.1 2556.2,2230.3 2556.2,2395.4 2589.5,2428.7 v1(2589.5,2539.7)
  Layer 4 w6.16: v1(1062.2,569) 1074.93,556.27 1078.31,556.27 1093.78,540.79 1093.78,266.59 1087.34,260.14 v1(1087.34,257.54)
  Bottom Layer w6.16: v1(1997.53,517.32) 1994.83,517.32 1986.85,525.3 1985.3,525.3 1985.3,608.8 2004.1,627.6 2004.1,1866.4 2102.8,1965.1 v1(2215.2,1965.1) ; v1(2589.5,2539.7) 2589.96,2540.16 U34.4@2589.96,2540.32
UART2_TX: R290.2 U33.4 | length 143.5
  Bottom Layer w6.16: R290.2@2534.26,2338.28 2553.16,2357.18 2553.16,2409.22 2569.04,2425.1 2569.04,2444.9 2573.96,2449.82 U33.4@2589.46,2449.82
UART2_TX_M0_DEBUG: BTB_3.20 U33.2 | length 3026.2
  Top Layer w6.16: BTB_3.20@1670.5,200.5 1672.35,202.34 1672.35,232.65 1725.4,285.7 1751.4,285.7 ; 1751.4,286.5 1869.79,286.5 2016.8,433.51 2016.8,452.31 2023.47,458.98 2023.47,470.41 v1(2025.38,472.32) ; v1(2217,1987.3) 2411.5,1987.3 2431.2,2007 2431.2,2198.1 2452.4,2219.3 2508.8,2219.3 2540.3,2250.8 2540.3,2405.7 v1(2518.7,2427.3)
  Bottom Layer w6.16: v1(2025.38,472.32) 1996.72,500.98 1992.45,500.98 1965.7,527.73 1965.7,585.6 1940.3,611 1938.5,612.8 1938.5,630.97 1935.83,633.64 1933.17,634.74 1932.24,634.87 1931.23,635.55 1930.57,635.82 1930.07,636.32 1927.01,638.36 1924.88,639.26 1914.97,649.17 1914.97,649.95 1912.03,654.36 1911.53,654.86 1910.45,656.73 1910.45,657.46 1908.41,662.39 1907.89,662.91 1907.33,664.99 1907.33,665.7 1906.3,670.9 1905.74,671.45 1905.74,731.04 1932.63,757.93 1932.63,1863.33 2056.3,1987 2088.4,1987 ; 2088.4,1987.3 v1(2217,1987.3) ; U33.2@2518.6,2424.23 2518.6,2427.2 v1(2518.7,2427.3)
UART4_RX_M2: BTB_3.45 R197.1 | length 1420.4
  Top Layer w6.16: BTB_3.45@2162.63,211.97 2162.63,283.43 2185.7,306.5 2193.7,306.5 2299.35,412.15 2299.35,417.25 v1(2277.87,438.73)
  Layer 4 w5.61: v1(2498.7,885.5) 2525.7,885.5 2545,904.8 2580.2,904.8 2668,992.6 2761.84,992.6 v1(2781.19,1011.95)
  Bottom Layer w6.16: v1(2277.87,438.73) 2275.77,438.73 2193.84,520.66 2193.84,616.23 2194.14,616.53 2194.14,658.74 2208.3,672.9 2208.3,869.49 2211.91,873.1 2486.3,873.1 v1(2498.7,885.5) ; v1(2781.19,1011.95) 2788.83,1011.95 R197.1@2796.68,1019.8
UART4_TX_M2: BTB_3.43 R195.1 | length 1624
  Top Layer w6.16: BTB_3.43@2123.26,190.65 2123.26,285.39 v1(2209.19,371.31) ; v1@2210.95,369.55 v1@2215.3,373.9 ; v1(2569.7,873.7) 2605.8,873.7 2624.5,892.4 2624.5,927.8 2659.23,962.53 2782.77,962.53 v1(2796.5,948.8)
  Bottom Layer w6.16: v1(2209.19,371.31) 2209.74,371.31 2221.7,359.35 2244.14,359.35 2255.3,370.51 2255.3,377.91 2231.21,402 2225.5,402 2178.8,448.7 2134.65,492.85 2134.65,497.95 2152.05,515.35 2152.05,698.95 2151.63,699.37 2151.63,875.53 2204.7,928.6 2561.6,928.6 2569.7,920.5 v1(2569.7,873.7)
UART7_RX_M2: BTB_3.25 R198.2 | length 1503.7
  Top Layer w5.61: BTB_3.25@1768,179.1 1770.48,176.62 1770.48,142.87 1773.31,140.04 1773.31,133.12 v1(1775.32,131.1)
  Top Layer w6.16: v1(1739.28,343.18) 1740.46,342 1803.56,342 1805.9,344.34 1805.9,383.8 1819.6,397.5 v1(1819.6,552.8) ; v1(2404,907.1) 2404,947.88 R198.2@2440.52,984.4
  Layer 4 w4: v1(1819.6,552.8) 1820.2,552.2 v1@1820.2,551.4
  Layer 4 w5.61: v1(1739.28,343.18) 1739.28,342.89 1721.89,325.49 1721.89,225.31 1776.59,170.61 1776.59,132.37 v1(1775.32,131.1) ; v1@1820.2,551.4 1927.7,551.4 2028.6,652.3 2028.6,825.1 2099.58,896.08 2103.72,896.08 2105.6,894.2 2186.3,894.2 2199.2,907.1 v1(2404,907.1)
UART7_TX_M2: BTB_3.49 R196.2 | length 1269
  Top Layer w6.16: v1(2438.4,903.2) 2438.4,908.48 R196.2@2440.22,910.3
  Layer 4 w5.61: v1(2242.6,150.5) 2242.6,190.5 1951.7,481.4 1949.4,481.4 1939.6,491.2 1939.6,505.85 1947.4,513.65 1947.4,546.8 2050.5,649.9 2050.5,814 2119.3,882.8 2418,882.8 v1(2438.4,903.2)
USB20_DM1: J9.11 R88.1 U11.2 U11.9 | length 308.7
  Bottom Layer w4.4: J9.11@1347,3224.2 1344.15,3221.35 1325.05,3221.35 1321.57,3217.87 1321.57,3214.23 1353.63,3182.17 1353.63,3141.18 1396.18,3098.63 1396.18,3066.69 1401.82,3061.05 U11.2@1401.82,3056.13 U11.9@1401.82,3024.63 1401.82,2974.48 R88.1@1404.68,2971.63
USB20_DP1: J9.12 R90.1 U11.1 U11.10 | length 319.2
  Bottom Layer w4.4: J9.12@1274.82,3223.93 1282.27,3216.48 1304.32,3216.48 1345.23,3175.58 1345.23,3137.71 1387.78,3095.15 1387.78,3066.69 1382.14,3061.05 U11.1@1382.14,3056.13 U11.10@1382.14,3024.63 1382.14,2983.47 R90.1@1370.3,2971.63
USB20_HOST0_DM: BTB_4.62 R88.2 | length 1257.6
  Top Layer w4.4: BTB_4.62@2044.52,2472.17 2044.84,2471.85 2044.84,2421.04 v1(2045.16,2420.72)
  Bottom Layer w4.4: R88.2@1404.68,2932.27 1393.4,2920.99 1393.4,2906 1466.88,2832.52 1882.76,2832.52 2136.2,2579.08 2136.2,2416.72 2098.68,2379.2 2068.6,2379.2 2045.8,2402 2045.8,2420.08 v1(2045.16,2420.72)
USB20_HOST0_DP: BTB_4.61 R90.2 | length 1251.7
  Top Layer w4.4: BTB_4.61@2064.2,2472.17 2064.93,2471.45 2064.93,2421.44 v1(2065.65,2420.72)
  Bottom Layer w4.4: R90.2@1370.3,2932.27 1385,2917.57 1385,2910.51 1385,2902.52 1400.27,2887.25 1400.27,2883.61 1398.13,2881.46 1398.13,2878.44 1410.24,2866.33 1413.26,2866.33 1415.71,2868.78 1418.74,2868.78 1430.84,2856.68 1430.84,2853.65 1428.39,2851.2 1428.39,2848.17 1440.5,2836.07 1443.53,2836.07 1445.67,2838.21 1449.31,2838.21 1463.4,2824.12 1465.69,2824.12 1879.28,2824.12 2127.8,2575.6 2127.8,2420.2 2095.2,2387.6 2072.08,2387.6 2061.35,2398.33 2061.35,2406.27 2067.1,2412.02 2067.1,2419.27 v1(2065.65,2420.72)
USB20_HOST1_DM: BTB_4.65 R143.1 | length 3142.3
  Top Layer w4.4: v1(428.72,1255.8) 428.72,1258.36 434.61,1264.25 434.61,1931.71 509.22,2006.32 509.22,2257.92 535,2283.7 682.92,2283.7 760.22,2361 1351.4,2361 1420.7,2291.7 1543,2291.7 1579.8,2254.9 1962.1,2254.9 2011.71,2304.51 2011.71,2392.85 1988.19,2416.38 1988.19,2469.45 BTB_4.65@1985.46,2472.17
  Bottom Layer w4.4: v1(428.72,1255.8) 428.72,1253.24 434.61,1247.35 434.61,1232.6 494.9,1172.31 494.9,1000.33 497.48,997.75 516.01,997.75 R143.1@525.61,988.15
USB20_HOST1_DM_R: J13.5 R143.2 | length 81.4
  Bottom Layer w4.4: R143.2@564.97,988.15 582.35,1005.53 J13.5@639.2,1005.53
USB20_HOST1_DP: BTB_4.64 R142.1 | length 3148.9
  Top Layer w4.4: v1(448.9,1255.8) 448.9,1258.36 443.01,1264.25 443.01,1928.23 517.62,2002.84 517.62,2254.44 538.48,2275.3 686.4,2275.3 763.7,2352.6 1347.92,2352.6 1417.22,2283.3 1539.52,2283.3 1576.32,2246.5 1965.58,2246.5 2016.3,2297.22 2020.12,2301.04 2020.12,2324.47 2022.69,2327.05 2027.4,2327.05 2029.54,2329.19 2029.54,2346.31 2027.4,2348.45 2022.25,2348.45 2020.12,2350.59 2020.12,2367.71 2022.25,2369.85 2027.4,2369.85 2029.54,2371.99 2029.54,2389.11 2027.4,2391.25 2022.69,2391.25 2020.12,2393.83 2020.12,2396.33 2009.98,2406.46 1996.59,2419.86 1996.59,2429.16 2005.15,2437.72 BTB_4.64@2005.15,2472.17
  Bottom Layer w4.4: v1(448.9,1255.8) 448.9,1253.24 443.01,1247.35 443.01,1236.08 503.3,1175.79 503.3,1014.93 505.88,1012.35 516.01,1012.35 R142.1@525.61,1021.95
USB20_HOST1_DP_R: J13.3 R142.2 | length 75.6
  Bottom Layer w4.4: R142.2@564.97,1021.95 568.23,1025.21 J13.3@639.2,1025.21
USB20_HOST_PWR_EN: R39.2 R324.1 | length 3198.4
  Top Layer w6.16: v1(1439,2201.2) 1439,2137.1 1468.31,2107.79 1575.01,2107.79 1590.49,2123.26 1800.11,2123.26 1821.61,2101.76 1974.51,2101.76 2113.4,1962.87 2113.4,1527.84 2149.39,1491.85 2151.13,1491.85 2164.54,1478.44 v1(2164.54,1476.7)
  Layer 4 w5.61: v1(1402.68,3457.96) 1402.92,3458.2 1434.6,3458.2 1504.7,3388.1 1504.7,3223.4 1503.12,3221.82 1503.12,3157.88 1580.01,3080.99 1580.01,2377.41 1439,2236.4 v1(1439,2201.2) ; v1(2164.54,1476.7) 2160.7,1472.86 2160.7,1347.16 2226.78,1281.09 2228.09,1281.09 2260.6,1248.57 2260.6,1097.6 2273.01,1085.19 2273.01,1070.29 v1(2274.6,1068.7)
USB30_DM: J9.2 R79.1 U10.5 U10.6 | length 469.5
  Bottom Layer w4.4: R79.1@1248.7,2970.61 1227.96,2991.35 U10.6@1227.96,3023.33 U10.5@1227.96,3054.83 1227.96,3059.75 1222.38,3065.32 1222.38,3112.73 1207.1,3128.01 1207.1,3186.03 1233.7,3212.63 1233.7,3237.74 1275.4,3279.44 1275.4,3292.6 1325.28,3342.48 1346.18,3342.48 J9.2@1353.63,3349.93
USB30_DP: J9.3 R80.1 U10.4 U10.7 | length 468.2
  Bottom Layer w4.4: R80.1@1214.2,2970.61 1214.2,3012.49 1208.28,3018.41 U10.7@1208.28,3023.33 U10.4@1208.28,3054.83 1211.98,3058.53 1211.98,3108.42 1196.7,3123.7 1196.7,3187.51 1225.3,3216.11 1225.3,3241.21 1267,3282.91 1267,3296.08 1307.7,3336.78 1307.7,3342.14 1305.12,3344.72 1280.38,3344.72 J9.3@1277.8,3347.3 ; J9.3@1274.82,3341.61 J9.3@1274.82,3349.93
USB30_OTG_PWR_EN: R38.2 R96.1 | length 4088.9
  Top Layer w6.16: v1(1417.3,2203.9) 1417.3,2136.4 1456.07,2097.63 1581.83,2097.63 1597.3,2113.1 1793.3,2113.1 1814.8,2091.6 1967.7,2091.6 2101.4,1957.9 2101.4,1520.16 v1(2144.86,1476.7)
  Layer 4 w5.61: v1(1152,3508.8) 1151.9,3508.9 1003.2,3508.9 967.3,3473 967.3,3152.9 1000.1,3120.1 1507.9,3120.1 1566.3,3061.7 1566.3,2388.7 1530.4,2352.8 1495.2,2352.8 1417.3,2274.9 v1(1417.3,2203.9) ; v1(2144.86,1476.7) 2148.7,1472.86 2148.7,1343.5 2248.6,1243.6 2248.6,1095.8 2241.6,1088.8 v1(2241.6,1069.4)
  Bottom Layer w5.61: v1(1152,3508.8) 1152,3433.7 1179.2,3406.5 1220.7,3406.5 1237.43,3423.23 R96.1@1237.43,3444.75
  Bottom Layer w6.16: R38.2@2240.6,1068.78 2240.98,1068.78 v1(2241.6,1069.4)
USB30_RXN: J9.5 R83.1 U10.2 U10.9 | length 642.6
  Bottom Layer w4.42: J9.5@1172.6,3293.4 1172.7,3293.5 1187,3293.5 1208.34,3314.84 1208.34,3378.86 1201.7,3385.5 1148.2,3385.5 1129.1,3366.4 1129.1,3339.5 1107.7,3318.1 1107.7,3285.3 1130.05,3262.95 1130.05,3230.11 cw(c1055.52,3205.03) 1132.93,3191.2 cw(c1055.52,3205.03) 1128.22,3175.07 1128.22,3140.2 1128.22,3095.51 1140.23,3083.5 1147.81,3075.92 1151.87,3071.86 1157.7,3071.86 1165.2,3064.35 1165.2,3058.52 U10.2@1168.9,3054.83 U10.9@1168.9,3023.33 1168.9,3018.41 1163.8,3013.31 1163.8,2986.51 R83.1@1179.7,2970.61
USB30_RXP: J9.6 R84.1 U10.1 U10.10 | length 656
  Bottom Layer w4.42: R84.1@1145.2,2970.61 1154.38,2979.79 1154.38,3013.25 1149.22,3018.41 U10.10@1149.22,3023.33 U10.1@1149.22,3054.83 1146.96,3063.44 1118.8,3091.6 1118.8,3176.99 ccw(c1055.52,3205.03) 1120.63,3228.51 1120.63,3259.05 1098.28,3281.4 1098.28,3282.75 1097.1,3283.93 1097.1,3322.49 1113.54,3338.93 1113.73,3338.93 1116.77,3341.97 1116.77,3372.27 1140.9,3396.4 1206.21,3396.4 1219.24,3383.37 1219.24,3310.88 1235.52,3294.6 J9.6@1235.52,3290.83
USB30_TXN: C75.1 J9.8 U11.4 U11.7 | length 365
  Bottom Layer w4.42: J9.8@1399.7,3291.6 1407.43,3283.87 1417.13,3283.87 1423.57,3277.43 1423.57,3273.77 1403,3253.2 1403,3208.21 1428.6,3182.61 1428.6,3115.01 1446.36,3097.25 1446.36,3066.21 1441.2,3061.05 U11.4@1441.2,3056.13 U11.7@1441.2,3024.63 1441.2,2973.78 C75.1@1439.05,2971.63
USB30_TXP: C76.1 J9.9 U11.5 U11.6 | length 376.3
  Bottom Layer w4.42: J9.9@1471.72,3290.83 1461.2,3290.83 1451.82,3281.45 1449.95,3281.45 1412.42,3243.92 1412.42,3212.11 1438.02,3186.51 1438.02,3118.91 1455.78,3101.15 1455.78,3066.14 1460.88,3061.05 U11.5@1460.88,3056.13 U11.6@1460.88,3024.63 1460.88,2984.18 C76.1@1473.43,2971.63
VBUS5V0_TYPEC: C74.1 C87.1 C88.1 J8.A4 J8.A9 J8.B4 J8.B9 U5.2 U6.1 | length 1887.5
  Top Layer w12: v1(541.8,3585.9) 578.93,3585.9 579.3,3585.53 ; J8.A9@680.86,3453.02 680.86,3473.86 690.22,3483.22 690.22,3505.68 J8.B4@690.31,3505.77 690.22,3505.87 690.22,3541.28 653,3578.5 586.33,3578.5 579.3,3585.53 ; J8.A4@779.29,3453.02 779.38,3453.11 779.38,3476.37 788.64,3485.63 788.64,3505.68 J8.B9@788.74,3505.77 788.74,3548.04 801.31,3560.61 801.31,3638.69 793.4,3646.6 760,3646.6 730.6,3617.2 593.9,3617.2 579.3,3602.6 579.3,3585.53
  Layer 4 w12: v1(541.8,3585.9) 522.2,3566.3 522.2,3327 531.3,3317.9 532.2,3317.9 552.1,3298 552.1,3199.72 601.5,3150.32 601.5,3036 v1(703.4,2934.1) ; v1(698.76,3126.47) 698.76,2988.04 v1(705.1,2981.7)
  Bottom Layer w12: U6.1@605.4,3106.39 607.79,3104 607.79,3024.59 C87.1@610.18,3022.2 650.68,2981.7 v1(705.1,2981.7) 705.1,2935.8 v1(703.4,2934.1) ; v1(698.76,3126.47) 704.56,3132.27 710.11,3132.27 722.75,3144.91 734.93,3144.91 U5.2@735.02,3145
VCC3V3_PCIECLK: C162.1 C163.1 C168.1 C186.1 C187.1 R223.1 R224.1 R225.1 R226.1 R235.1 U26.1 U27.5 | length 453.1
  Top Layer w12: U26.1@234.03,2093.25 244.49,2093.25 246.36,2091.38 C162.1@246.36,2054.53 261.86,2039.03 U27.5@308.07,2039.03
  Bottom Layer w12: C168.1@88.06,2257.43 R235.1@88.06,2221.5 168.67,2221.5 ; R223.1@190.42,2277.53 190.66,2277.29 190.66,2243.97 R224.1@190.9,2243.73 168.67,2221.5 ; v1(217.38,2091.43) 217.31,2091.43 R226.1@194.3,2114.43 194.06,2114.67 194.06,2146.09 R225.1@193.82,2146.33 182.32,2157.83 177.56,2157.83 168.67,2166.73 168.67,2221.5
  other v1: 293.78,2036.93
VCC3V3_PCIEx4: C180.1 C193.1 C194.2 J20.A9 J20.A10 J20.B8 J20.B10 L17.2 R249.2 | length 402.8
  Top Layer w20: C193.1@-402.48,2374.32 -404.28,2372.52 -404.28,2334.9 C180.1@-411.48,2327.7 ; R249.2@-354.56,2094.8 -451.18,2191.42 -451.18,2288 C180.1@-411.48,2327.7 ; L17.2@-350.55,2322.4 -355.85,2327.7 C180.1@-411.48,2327.7
  other v1: -353.46,2096
VCC3V3_SD_S3: C9.1 C10.1 D23.1 J24.4 R285.2 | length 325.4
  Top Layer w12: D23.1@2295.06,2293.02 2295.28,2292.8 2354.51,2292.8 J24.4@2354.73,2292.58 2425.98,2292.58 2458.69,2325.29 v1(2458.69,2406.22)
  Bottom Layer w12: v1(2458.69,2406.22) 2458.84,2406.37 2458.84,2473.07 R285.2@2458.99,2473.22
VCC4V0_SYS: BTB_1.1 BTB_1.2 BTB_1.3 BTB_1.4 BTB_1.5 BTB_1.96 BTB_1.97 BTB_1.98 BTB_1.99 BTB_1.100 C20.2 C21.1 C22.1 C23.1 C24.1 C27.1 L3.2 R11.1 R12.1 R24.2 U2.5 U23.2 | length 3110.5
  Top Layer w12: v1(-283.2,2484.4) -283.2,2483.28 -267.49,2467.56 -267.49,2464.39 -259,2455.9 -185.9,2455.9 -136.14,2406.14 -136.14,2378.1 -120.99,2362.95 -7.35,2362.95 0.2,2370.5 0.2,2387.56 R12.1@4.2,2391.56 ; BTB_1.100@159.49,38.17 159.19,38.47 159.19,145.31 158.9,145.6 159.19,145.89 159.19,195.36 BTB_1.1@159.49,195.65 ; BTB_1.99@179.17,38.17 179.17,140.65 180.55,142.03 180.55,144.08 v1@181.34,144.87 ; BTB_1.2@179.17,195.65 180.25,194.57 180.25,148.07 182.3,146.02 v1@182.3,143.78 ; BTB_1.98@198.86,38.17 198.86,113.41 201.54,116.1 201.54,144.98 v1@201.02,145.51 ; v1@198.86,145.51 BTB_1.3@198.86,195.65 ; BTB_1.97@218.54,38.17 218.54,106.68 220.7,108.84 220.7,145.1 219.91,145.89 219.91,153.59 219.62,153.87 219.62,194.57 BTB_1.4@218.54,195.65 ; BTB_1.96@238.23,38.17 238.23,113.25 240.38,115.41 v1@240.38,145.32 ; v1@238.23,145.32 BTB_1.5@238.23,195.65 ; v1(407.94,-13) 408.4,-13.46 408.4,-32.68 R24.2@436.6,-60.88
  Top Layer w15: U2.5@-11.93,2604.18 v1(-9.24,2604.18) ; v1(76.62,2652.57) 76.84,2652.79 76.84,2654.86 91.35,2669.37 C20.2@93.62,2669.37
  Layer 3 w12: v1(239.56,84.8) 337.36,-13 v1(407.94,-13)
  Layer 4 w12: v1(407.94,-13) 427.64,6.7 716.7,6.7 755,-31.6 1570.6,-31.6 1637.4,-98.4 1780.5,-98.4 v1(1816.9,-62)
  Bottom Layer w12: v1(1816.9,-62) 1818.34,-62 R11.1@1859.7,-103.36
  Bottom Layer w15: v1(-9.24,2604.18) -8.93,2604.18 8.3,2621.41 48.89,2621.41 C27.1@74.4,2646.92 76.5,2644.82 C27.1@76.5,2644.5
  other v1: 138.4,84.8 158.63,84.8 178.86,84.8 199.09,84.8 219.32,84.8 138.2,104.8 158.43,104.8 178.66,104.8 198.89,104.8 219.12,104.8 239.36,104.8 138.4,125.2 158.63,125.2 178.86,125.2 199.09,125.2 219.32,125.2 239.56,125.2 139.23,144.87 159.46,144.87 179.69,144.87 199.92,144.87 220.15,144.87 240.38,144.87 -302.9,2485 -283.2,2510.3 -302.9,2510.9 -281.6,2531.2 -301.3,2531.8 -301.3,2553.1 -281.6,2552.5 -301.3,2576.2 -281.6,2575.6 -301.3,2602.1 -281.6,2601.5 -307.6,2626.2 -286.6,2628.2 -308.59,2652.06 -288.91,2652.3
VCC5V0_USB20_HOST: C285.1 C286.1 J9.10 U48.1 | length 533.3
  Top Layer w12: J9.10@1452.02,3223.93 1458.01,3229.92 1477.67,3229.92 1503.38,3255.62 1503.38,3355.54 1497.4,3361.51 1497.4,3478.53 1500.97,3482.1 1500.97,3492.15 1518.07,3509.24 v1(1518.07,3510.36)
  Bottom Layer w12: C286.1@1482.78,3687.43 1482.78,3654.03 1482.78,3616.13 1476.98,3610.33 1486.81,3610.33 1502.42,3594.73 1502.76,3594.73 1518.9,3578.59 v1(1518.9,3530.03) ; v1(1518.07,3510.36) 1518.48,3510.78 1518.48,3529.75 v1@1518.2,3530.03
  other v1: 1554.25,3510.43 1556.1,3530.03
VCC5V0_USB30_OTG: C90.1 C91.1 J9.1 R150.1 U7.1 | length 2946.5
  Top Layer w12: v1(1340.3,3584.53) 1340.3,3460.83 1451.2,3349.93 J9.1@1452.02,3349.93 ; v1(1980.45,2350.55) 1981.51,2350.55 R150.1@1981.9,2350.94
  Layer 4 w12: v1@1340.53,3584.13 1371.81,3584.13 1374.59,3581.35 1411.35,3581.35 1467.43,3637.43 2032.97,3637.43 2070.7,3599.7 2070.7,3551.2 2134.4,3487.5 2134.4,3424 2179.6,3378.8 2179.6,3005.7 2071.4,2897.5 2071.4,2777.7 2048.87,2755.17 2039.63,2755.17 ; v1(1980.45,2350.55) 1834.55,2350.55 1809,2376.1 1809,2722.9 1869.8,2783.7 1939.6,2783.7 1968.1,2755.2 2039.6,2755.2
  Bottom Layer w12: C90.1@1302.78,3688.13 1302.78,3615 U7.1@1297.21,3609.43 1297.43,3609.22 1331.78,3609.22 1340.3,3600.7 v1(1340.3,3584.53)
  other v1: 1335.4,3608.2 1283.1,3608.6 1307.2,3608.8
VCC5V0_USB_S0: C7.2 C8.1 C11.1 C72.1 C73.1 L2.2 R4.2 U5.12 U5.13 U6.5 U7.5 U48.5 | length 415.3
  Top Layer w20: v1(-207.6,3425.1) -207.6,3423.92 -164.81,3381.13 -164.81,3269.19 -206.56,3227.44 L2.2@-206.56,3209.72
  Bottom Layer w12: C73.1@772.06,3063.4 C73.1@772.16,3063.5 ; C73.1@772.06,3069.4 772.72,3070.06 U5.13@772.82,3097.36 U5.13@772.82,3097.36 ; v1(773.9,3069.4) 772.72,3069.4 772.16,3068.84 C73.1@772.16,3063.5 ; U5.12@792.5,3097.36 792.6,3097.27 792.6,3076.96 C72.1@805.96,3063.6 805.86,3063.5 773.9,3063.5 C73.1@772.16,3063.5 ; U7.5@1198.79,3609.43 1198.79,3613.16 U7.5@1201.51,3615.88
  Bottom Layer w20: C11.1@-252.1,3216.62 -250.3,3214.82 -211.66,3214.82 C8.1@-206.56,3209.72
  other v1: 785.5,3052.2 763.04,3052.98 754.64,3073.48 733.9,3076.4 -206.2,3184 -227.9,3184.5 -185.1,3184.8 613.9,3190 -206.1,3205 -227.8,3205.5 -185,3205.8 594.5,3205.5 613.39,3211.02 -206.5,3225.3 596.63,3225.07 -228.2,3225.8 -185.4,3226.1 1182.5,3607.4 1209.8,3607.5 1367.7,3609.9 1394.7,3609.9
VCC12V_PCIEx4: C197.1 C198.1 J20.A2 J20.A3 J20.B1 J20.B2 J20.B3 Q30.3 | length 72.9
  Top Layer w20: Q30.3@-438.85,2633.35 -432.1,2640.1 v1(-432.1,2657.6)
  Bottom Layer w20: C197.1@-437.85,2663.35 v1(-432.1,2657.6) -400.1,2657.6 C198.1@-396.05,2653.55
  other v1: -453.8,2655.1 -430.8,2677.5 -452.9,2679.3